# Altium PCB ARAStronaut.PcbDoc
Units mm, origin at the board's own origin, x right, y up, seen from the top; angles counter-clockwise.
Board outline 152.4 x 101.6 mm, 2 copper layers (Top Layer, Bottom Layer); 65 components, 48 nets, 267 pads, 0 vias.
Unrouted connection lines stored in the file: 180.
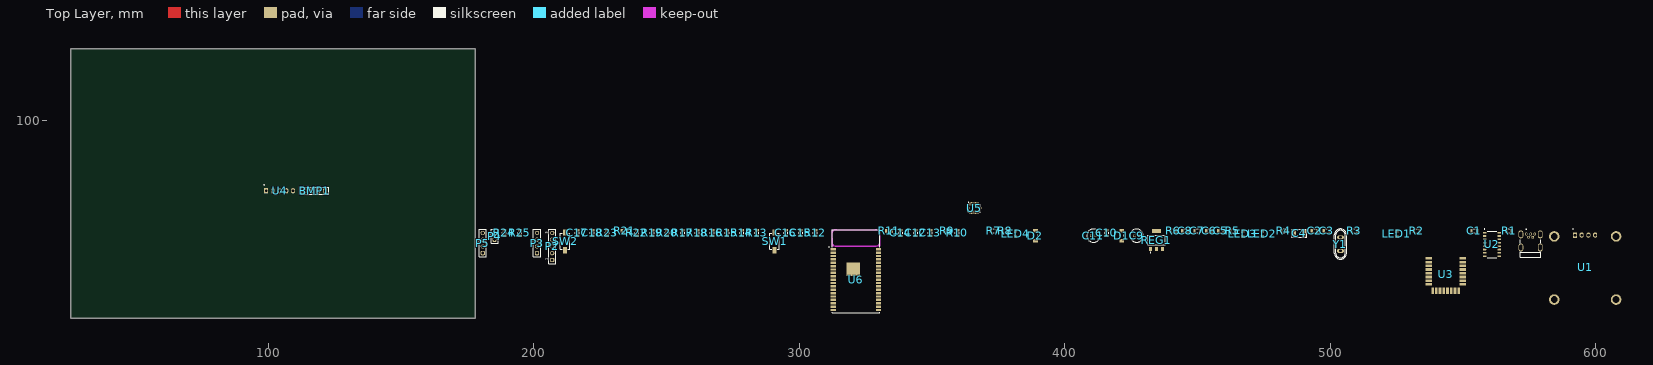
[diagram p0: Top Layer view]
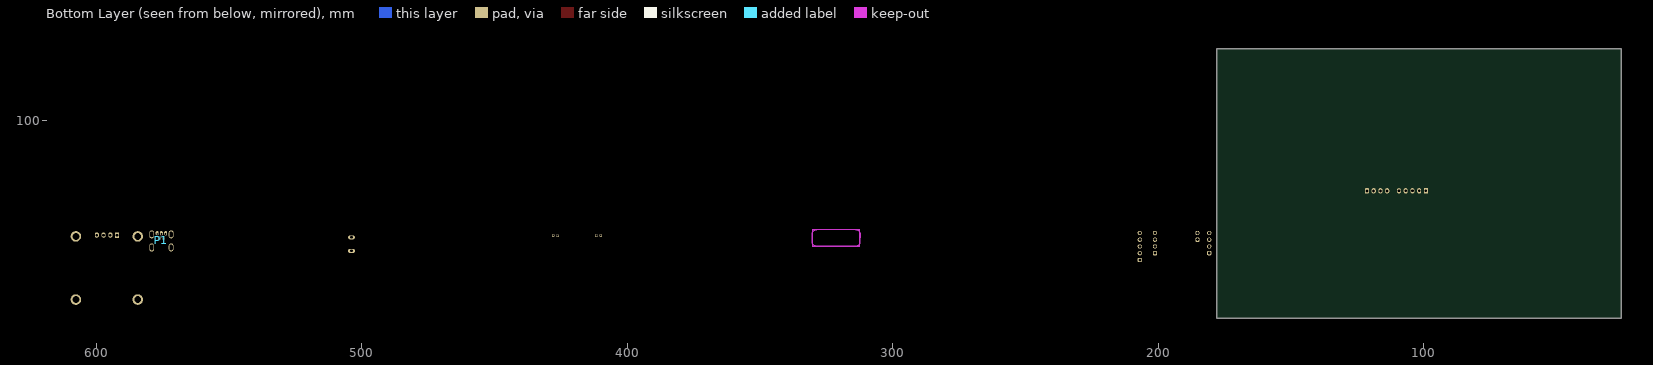
[diagram p1: Bottom Layer view, seen from below]

## Layer stack, top to bottom
Top Solder: solder mask 0.0102, Solder Resist, Dk 3.5
Top Layer: signal copper 0.0356
Dielectric 1: dielectric 0.32, FR-4, Dk 4.8
Bottom Layer: signal copper 0.0356
Bottom Solder: solder mask 0.0102, Solder Resist, Dk 3.5

## Board outline
25.4,25.4 177.8,25.4 177.8,127 25.4,127

## Design rules (kind name [scope] priority, off if disabled: settings)
Clearance [All] p1: gap=0.2 ignorepadtopadclearanceinfootprint=FALSE except(0.3: Arc-Poly Track-Poly SMDPad-Poly THPad-Poly Via-Poly Fill-Poly Poly-Poly Poly-Region Poly-Text Poly-Hole)
PolygonConnect [All] p1: connectstyle=Relief reliefconductorwidth=0.254 reliefentries=4 polygonreliefangle="90 Angle" airgapwidth=0.254
RoutingVias [All] p1: holewidth=0.5 width=0.8 viastyle="Through Hole" minholewidth=0.5 minwidth=0.8 maxholewidth=1.5 maxwidth=2
SolderMaskExpansion [All] p1: expansion=0.102 istentingtop=FALSE
Width [All] p1: maxlimit=0.6 minlimit=0.3 preferedwidth=0.3
30 further rules are at their usual default settings.

## Components (designator, comment, footprint, x,y, rotation, side; value= is the part's Value field where it differs from the comment)
BMP1 "BMP_180_MOD" BMP180 117.475,73.406 r180 top
C1 "22pf" "SMD 805 CAP" 554.355,58.293 r0 top
C2 "1uF" "SMD 805 CAP" 494.157,58.293 r0 top
C3 "10uF" "SMD 805 CAP" 498.729,58.293 r0 top
C4 "10uF" MY_CAP_SMD-B 488.442,57.404 r0 top value=3300u
C5 "10uf" "SMD 805 CAP" 458.851,58.293 r0 top
C6 "1uF" "SMD 805 CAP" 454.406,58.293 r0 top
C7 "100nf" "SMD 805 CAP" 449.961,58.293 r0 top
C8 "22pf" "SMD 805 CAP" 445.389,58.293 r0 top
C9 "47uF-5mm" "MY_CAP_POL 5MM" 427.101,56.515 r0 top value=3300u
C10 "1uF" "SMD 805 CAP" 415.798,57.531 r90 top
C11 "33uF-5mm" "MY_CAP_POL 5MM" 410.845,56.515 r0 top value=3300u
C12 "100nF" "SMD 805 CAP" 343.789,57.531 r90 top
C13 "100nF" "SMD 805 CAP" 349.377,57.531 r90 top
C14 "1uF" "SMD 805 CAP" 338.201,57.531 r90 top
C15 "100nF" "SMD 805 CAP" 300.482,57.531 r90 top
C16 "100nF" "SMD 805 CAP" 294.894,57.531 r90 top
C17 "22uF" "SMD 805 CAP" 216.408,57.531 r90 top
C18 "100nF" "SMD 805 CAP" 221.996,57.531 r90 top
D1 "MM 5.1V" MiniMelf 421.513,56.515 r90 top
D2 "MM 3.6V" MiniMelf 389.001,56.515 r90 top
LED1 "LED_SMD_0805" LED_0805 525.145,57.277 r90 top
LED2 "LED_SMD_0805" LED_0805 474.472,57.277 r90 top
LED3 "LED_SMD_0805" LED_0805 467.106,57.277 r90 top
LED4 "LED_SMD_0805" LED_0805 381.508,57.277 r90 top
P1 "USB_Mini_Dip_Right" USB_MINI_Right 575.564,54.737 r0 top
P2 "61300511121" 61300511121 206.883,52.451 r90 top
P3 "61300411121" 61300411121 201.168,53.721 r90 top
P4 "61300211121" 61300211121 185.166,56.261 r90 top
P5 "61300411121" 61300411121 180.721,53.721 r90 top
R1 "1k" "SMD 805" 567.436,58.293 r0 top
R2 "1k" "SMD 805" 532.638,58.293 r0 top
R3 "10K" "SMD 805" 509.143,58.293 r0 top
R4 "10K" "SMD 805" 482.6,58.293 r0 top
R5 "1k" "SMD 805" 463.423,58.293 r0 top
R6 "680" "SMD 805" 440.944,58.293 r0 top
R7 "1k" "SMD 805" 373.253,58.293 r0 top
R8 "INF" "SMD 805" 377.698,58.293 r0 top
R9 "INF" "SMD 805" 355.727,58.293 r0 top
R10 "4.7K" "SMD 805" 359.537,57.531 r90 top
R11 "1k" "SMD 805" 333.883,58.293 r0 top
R12 "0" "SMD 805" 306.07,57.531 r90 top
R13 "4.7k" "SMD 805" 283.972,57.531 r90 top
R14 "INF" "SMD 805" 278.384,57.531 r90 top
R15 "INF" "SMD 805" 272.796,57.531 r90 top
R16 "INF" "SMD 805" 267.208,57.531 r90 top
R17 "0" "SMD 805" 256.032,57.531 r90 top
R18 "220" "SMD 805" 261.62,57.531 r90 top
R19 "0" "SMD 805" 244.602,57.531 r90 top
R20 "220" "SMD 805" 250.19,57.531 r90 top
R21 "0" "SMD 805" 234.188,58.293 r0 top
R22 "220" "SMD 805" 238.76,57.531 r90 top
R23 "1k" "SMD 805" 227.584,57.531 r90 top
R24 "4.7k" "SMD 805" 188.849,57.531 r90 top
R25 "4.7k" "SMD 805" 194.691,57.531 r90 top
REG1 "LD1117 3.3" MY_LD1117-3.3 434.594,54.991 r0 top
SW1 "BOOT" WS-TASV_L6W3.5H4.3_4341x10438x6 290.703,54.356 r90 top
SW2 "ENABLE" WS-TASV_L6W3.5H4.3_4341x10438x6 211.709,54.356 r90 top
U1 "SSD1306" SSD1306 596.138,44.577 r0 top
U2 "CH340G" CH340G 560.959,53.213 r0 top
U3 "DWM1000" DWM1000 543.306,45.212 r0 top
U4 "HMC5883L" HMC5883L-GY271 102.91,73.476 r0 top
U5 "BMI088" BMI088 365.887,66.929 r0 top
U6 "ESP32-WROVER-I" ESP32-WROVER-I 320.167,40.386 r0 top
Y1 "CRYSTAL" My_Crystal 503.936,53.34 r90 top

## Footprints (in the part's own frame and the unit in brackets; to place one, negate y for a bottom-side part, rotate by r counter-clockwise, add the part's x,y. Pads: shape width x height; smd on the part's side, far side on the other; paste and mask are expansions set on the pad)
61300211121 [mm] "Pin Header, pitch 2.54 mm, THT, Vertical, single row, 2p"
  rrect50% 1.6x1.6 hole 1.1: 1(-1.27,0)
  round 1.6 hole 1.1: 2(1.27,0)
  silkscreen extent -2.69,-1.35 2.69,1.35, body extent -2.54,-1.27 2.54,1.27, height 8.57
61300411121 [mm] "Pin Header, pitch 2.54 mm, THT, Vertical, single row, 4p"
  rrect50% 1.6x1.6 hole 1.1: 1(-3.81,0)
  round 1.6 hole 1.1: 2(-1.27,0) 3(1.27,0) 4(3.81,0)
  silkscreen extent -5.23,-1.35 5.23,1.35, body extent -5.08,-1.27 5.08,1.27, height 8.57
61300511121 [mm] "Pin Header, pitch 2.54 mm, THT, Vertical, single row, 5p"
  rrect50% 1.6x1.6 hole 1.1: 1(-5.08,0)
  round 1.6 hole 1.1: 2(-2.54,0) 3(0,0) 4(2.54,0) 5(5.08,0)
  silkscreen extent -6.5,-1.35 6.5,1.35, body extent -6.35,-1.27 6.35,1.27, height 8.57
BMI088 [mm]
  oval 1x0.254 smd: 1(-2.471,-0.005) 1(2.471,-0.005)
  oval 0.254x1 smd: 1(-1.505,-1.721) 1(-1.505,1.721) 1(-1.005,-1.721) 1(-1.005,1.721) 1(-0.505,-1.721) 1(-0.505,1.721) 1(-0.005,-1.721) 1(-0.005,1.721) 1(0.495,-1.721) 1(0.495,1.721) 1(0.995,-1.721) 1(0.995,1.721) 1(1.495,1.721) 1(1.505,-1.721)
  rect 0.35x0.59 smd: 1(-1.505,1.161) 2(-1.005,1.161) 3(-0.505,1.161) 4(-0.005,1.161) 5(0.495,1.161) 6(0.995,1.161) 7(1.495,1.161) 9(1.495,-1.169) 10(0.995,-1.169) 11(0.495,-1.169) 12(-0.005,-1.169) 13(-0.505,-1.169) 14(-1.005,-1.169) 15(-1.505,-1.169)
  rect 0.59x0.35 smd: 8(1.91,-0.004) 16(-1.92,-0.004)
  silkscreen extent -2.26,-1.5 2.24,2.19, body extent -2.26,-1.5 2.24,1.5, height 1
BMP180 [mm]
  rrect50% 1.6x2 hole 1.1: 1(-3.81,0)
  oval 1.6x2 hole 1.1: 2(-1.27,0) 3(1.27,0) 4(3.81,0)
  silkscreen extent -5.23,-1.35 5.23,1.35, body extent -5.11,-1.19 5.11,11.8, height 5.69
CH340G [mm]
  rrect25% 1.31x0.62 smd: 1(-2.75,4.445) 2(-2.75,3.175) 3(-2.75,1.905) 4(-2.75,0.635) 5(-2.75,-0.635) 6(-2.75,-1.905) 7(-2.75,-3.175) 8(-2.75,-4.445) 9(2.75,-4.445) 10(2.75,-3.175) 11(2.75,-1.905) 12(2.75,-0.635) 13(2.75,0.635) 14(2.75,1.905) 15(2.75,3.175) 16(2.75,4.445)
  silkscreen extent -2.85,-5 1.78,5.85, body extent -3,-5 3,5, height 1.8
DWM1000 [mm]
  rect 2.45x1 smd: 1(-6.146,2.726) 2(-6.146,1.326) 3(-6.146,-0.074) 4(-6.146,-1.474) 5(-6.146,-2.874) 6(-6.146,-4.274) 7(-6.146,-5.674) 8(-6.146,-7.074) 17(6.654,-7.074) 18(6.654,-5.674) 19(6.654,-4.274) 20(6.654,-2.874) 21(6.654,-1.474) 22(6.654,-0.074) 23(6.654,1.326) 24(6.654,2.726)
  rect 1x2.45 smd: 9(-4.646,-9.369) 10(-3.246,-9.369) 11(-1.846,-9.369) 12(-0.446,-9.369) 13(0.954,-9.369) 14(2.354,-9.369) 15(3.754,-9.369) 16(5.154,-9.369)
  body extent -6.36,-9.59 6.84,13.41, height 3.15
ESP32-WROVER-I [mm]
  rect 2x0.9 smd: 1(-7.327,10.982) 2(-7.327,9.712) 3(-7.327,8.442) 4(-7.327,7.172) 5(-7.327,5.902) 6(-7.327,4.632) 7(-7.327,3.362) 8(-7.327,2.092) 9(-7.327,0.822) 10(-7.327,-0.448) 11(-7.327,-1.718) 12(-7.327,-2.988) 13(-7.327,-4.258) 14(-7.327,-5.528) 15(-7.327,-6.798) 16(-7.327,-8.068) 17(-7.327,-9.338) 18(-7.327,-10.608) 19(-7.327,-11.878) 20(9.673,-11.878) 21(9.673,-10.608) 22(9.673,-9.338) 23(9.673,-8.068) 24(9.673,-6.798) 25(9.673,-5.528) 26(9.673,-4.258) 27(9.673,-2.988) 28(9.673,-1.718) 29(9.673,-0.448) 30(9.673,0.822) 31(9.673,2.092) 32(9.673,3.362) 33(9.673,4.632) 34(9.673,5.902) 35(9.673,7.172) 36(9.673,8.442) 37(9.673,9.712) 38(9.673,10.982)
  rect 5x5 smd paste-1.835 mask-1.835: 39(0.173,3.482)
  Keep-Out Layer board cut-out: -7.75,12.142 -7.75,18.365 10.11,18.365 10.11,12.142
  Keep-Out Layer lines w0.254: -7.863,16.841 cw(c-6.301,16.841) -6.301,18.403 8.373,18.403 cw(c8.373,16.584) 10.193,16.584 10.125,13.588 cw(c8.768,13.588) 8.768,12.23 3.432,12.18 -0.292,12.18 -6.445,12.18 cw(c-6.445,13.489) -7.754,13.489 -7.863,16.841
  silkscreen extent -9.15,-12.98 10.17,18.42, body extent -7.83,-12.98 10.17,18.42, height 3.4
HMC5883L-GY271 [mm]
  rect 1.508x2 hole 1: 1(-3.85,-0.07)
  oval 1.508x2 hole 1: 2(-1.31,-0.07) 3(1.23,-0.07) 4(3.77,-0.07) 5(6.31,-0.07)
  silkscreen extent -4.65,2.08 -4.45,2.28, body extent -5.97,-12.12 8.53,1.38, height 5.67
LED_0805 [mm]
  rect 1.1x1.2 smd: 1(-1.05,0) 2(1.05,0)
  silkscreen extent -2,-0.6 -1.8,0.6, body extent -1,-0.63 1,0.62, height 0.7
MiniMelf [mm]
  rect 1.3x1.8 smd: 1(-1.905,0) 2(1.905,0)
  silkscreen extent -0.3,-0.8 0.3,0.8, body extent -1.82,-0.8 1.88,0.8, height 1.6
"MY_CAP_POL 5MM" [mm]
  round 1 hole 0.7: +(-0.827,0) -(0.827,0)
  silkscreen extent -2.48,-2.49 2.49,2.49, body extent -2.74,-2.6 2.84,2.48, height 11.7
MY_CAP_SMD-B [mm] "3.1X4"
  rect 1.2x2.5 smd: +(-1.845,0) -(1.845,0)
  silkscreen extent -2.8,-1.55 2.8,1.55, body extent -1.85,-1.41 1.85,1.41, height 2.14
My_Crystal [mil]
  oct 60x100 hole 40: 1(-100,0)
  oval 60x100 hole 40: 2(100,0)
  silkscreen extent -225,-90 225,90, body extent -225,-90 222,93, height 150
MY_LD1117-3.3 [mm]
  rect 1.1x1.55 smd: 1(-2.3,-3.502) 2(0,-3.502) 3(2.3,-3.502)
  rect 3.45x1.55 smd: 4(0,3.248)
  silkscreen extent -3.35,-4.95 3.35,1.72, body extent -3.3,-3.85 3.2,3.05, height 1.6
"SMD 805" [mm]
  rect 0.9x1.5 smd: 1(1.05,0) 2(-1.05,0)
  silkscreen extent -0.3,-0.75 0.3,0.75, body extent -1,-0.62 1,0.63, height 0.78
"SMD 805 CAP" [mm]
  rect 0.9x1.5 smd: 1(1.05,0) 2(-1.05,0)
  silkscreen extent -0.3,-0.75 0.3,0.75, body extent -1,-0.62 1,0.63, height 0.78
SSD1306 [mm]
  rect 1.508x2 hole 1: 1(-3.85,12.146)
  oval 1.508x2 hole 1: 2(-1.31,12.146) 3(1.23,12.146) 4(3.77,12.146)
  round 4 hole 2.6: ""(-11.65,11.654) ""(-11.65,-12.146) ""(11.65,-12.146) ""(11.65,11.654)
  silkscreen extent -4.65,14.3 -4.45,14.5, body extent -14.22,-13.72 14.18,13.68, height 5.79
USB_MINI_Right [mm]
  oval 1.1x1.65 smd far side paste-2 mask+0: 1(-1.6,2.663) 2(-0.8,0.913) 3(0,2.663) 4(0.8,0.913) 5(1.6,2.663)
  round 1.05 hole 0.7: 6(-1.6,2.388) 7(-0.8,1.188) 8(0,2.388) 9(0.8,1.188) 10(1.6,2.388)
  oval 1.8x3 hole 1.2 slot 2 at 90 deg mask+0: 11(-3.65,-2.662) 12(-3.65,2.261) 12(3.65,-2.662) 12(3.65,2.261)
  oval 1.7x2.7 smd far side paste-2 mask+0: S1(-3.65,-2.662) S2(3.65,-2.662)
  silkscreen extent -3.85,-6.41 3.85,4.34, body extent -3.95,-6.43 3.95,2.97, height 3.9
WS-TASV_L6W3.5H4.3_4341x10438x6 [mm] "SMD Tact Switch, body 6x3.5mm"
  rect 2.3x1.5 smd: 1(-3.35,0) 2(3.35,0)
  silkscreen extent -3,-1.75 3,1.75, body extent -4,-1.75 4,1.75, height 4.3

## Part data
C1 C5 C7 C8: library part "CAP B", "1uf"
C2 C3 C6 C10 C12 C13 C14 C15 C16 C17 C18: library part "CAP B"
C4: library part CAP_TANTAL_B, "3.5X2.8MM"
C9 C11: library part "Cap Pol_5mm", "CAP-3300Uf"
D1 D2: library part MiniMelf_500mW, "MiniMelf_500mW", Package=None, Availability=Unavailable, MP=ZM4736A_L0, Price=None
P2: "WR-PHD Pin Header, THT, Vertical, pitch 2.54mm, 1 Row, 5P", Contact Resistance=20mΩ, Manufacturer="Wurth Elektronik", Operating Temperature Max=105°C, Operating Temperature Min=-40°C, Rated Current=3A, Withstanding Voltage=500V, Working Voltage=250V, Category="Board-to-Board Connectors", ComponentLink1Description="Website Link", ComponentLink1URL=https://www.we-online.com/redexpert/article/61300511121?ad, ComponentLink2Description="Datasheet Link", ComponentLink2URL=https://www.we-online.com/redexpert/spec/61300511121?ad, Gender="Pin Header", Manufacturer Part Number=61300511121, Match Code=WR-PHD, Mount="Through Hole", Number of Pins=5, Number of Rows=1, Orientation=Vertical, Packaging=Bag, Pitch=2.54mm
P3 P5: "WR-PHD Pin Header, THT, Vertical, pitch 2.54mm, 1 Row, 4P", Contact Resistance=20mΩ, Manufacturer="Wurth Elektronik", Operating Temperature Max=105°C, Operating Temperature Min=-40°C, Rated Current=3A, Withstanding Voltage=500V, Working Voltage=250V, Category="Board-to-Board Connectors", ComponentLink1Description="Website Link", ComponentLink1URL=https://www.we-online.com/redexpert/article/61300411121?ad, ComponentLink2Description="Datasheet Link", ComponentLink2URL=https://www.we-online.com/redexpert/spec/61300411121?ad, Gender="Pin Header", Manufacturer Part Number=61300411121, Match Code=WR-PHD, Mount="Through Hole", Number of Pins=4, Number of Rows=1, Orientation=Vertical, Packaging=Bag, Pitch=2.54mm
P4: "WR-PHD Pin Header, THT, Vertical, pitch 2.54mm, 1 Row, 2P", Contact Resistance=20mΩ, Manufacturer="Wurth Elektronik", Operating Temperature Max=105°C, Operating Temperature Min=-40°C, Rated Current=3A, Withstanding Voltage=500V, Working Voltage=250V, Category="Board-to-Board Connectors", ComponentLink1Description="Website Link", ComponentLink1URL=https://www.we-online.com/redexpert/article/61300211121?ad, ComponentLink2Description="Datasheet Link", ComponentLink2URL=https://www.we-online.com/redexpert/spec/61300211121?ad, Gender="Pin Header", Manufacturer Part Number=61300211121, Match Code=WR-PHD, Mount="Through Hole", Number of Pins=2, Number of Rows=1, Orientation=Vertical, Packaging=Bag, Pitch=2.54mm
R1 R2 R3 R4 R5 R6 R7 R8 R9 R10 R11 R12 R13 R14 R15 R16 R17 R18 R19 R20 R21 R22 R23 R24 R25: library part Resistor
SW1 SW2: library part 434111043826, "WS-TASV SMT Tact Switch, L6 x W3.5 x H4.3mm, 260g, SPST-NO, 12V, 50mA", Manufacturer="Wurth Elektronik", Operating Temperature Max=85°C, Operating Temperature Min=-40°C, Rated Current=50mA, Rated Voltage (DC)=12V, Category="Tact Switches", Circuit=SPST-NO, ComponentLink1Description="Website Link", ComponentLink1URL=https://www.we-online.com/redexpert/article/434111043826?ad, ComponentLink2Description="Datasheet Link", ComponentLink2URL=https://www.we-online.com/redexpert/spec/434111043826?ad, Contact Material="Stainless Steel", Contact Plating=Silver, Height=4.3mm, Length=6mm, Manufacturer Part Number=434111043826, Match Code=WS-TASV, Mount="Surface Mount", Operation Force=260g, Packaging="Tape and Reel", Terminal Material="Copper Alloy", Terminal Plating=Silver, Washable=No, Width=3.5mm
Y1: "Crystal"

## Nets (pads, with @x,y where several pads share a name; then routed paths per layer and width w, separated by ;. In a path a pad name is that pad's centre, name@x,y a point inside that pad or via, vN(x,y) a via of type N, cw(c..) or ccw(c..) an arc to the next point about the centre after c; other vN are vias at no path point)
+3V3: BMP1.1 C2.1 C3.1 C4.+ C6.2 C11.+ C12.2 C13.2 C14.1 D2.2 P5.4 R3.1 R4.1 R6.2 R8.2 R9.2 R10.2 R11.1 R12.2 R23.2 R24.1 R25.1 REG1.2 REG1.4 U1.2 U3.5 U3.6 U3.7 U4.5 U5.3 U5.11
+3V3_USB: LED1.2 LED3.2
ACCEL_INT: U5.1 U6.11
BOOT: C16.2 R11.2 SW1.2 U6.25
BUS_SCL: BMP1.3 P4.1 R3.2 R24.2 U1.3 U4.3 U6.36
BUS_SDA: BMP1.4 P4.2 R4.2 R25.2 U1.4 U4.2 U6.33
CS_ACC: P2.1 R10.1 U5.14 U6.8
CS_GYR: P2.2 R9.1 U5.5 U6.10
CS_UWB: U3.17 U6.29
D+: P1.3 P1.8 U2.5
D-: P1.2 P1.7 U2.6
ENABLE: C17.2 C18.2 R23.1 SW2.2 U6.3
GND: BMP1.2 C1.2 C2.2 C3.2 C4.- C5.2 C6.1 C7.1 C8.1 C9.- C10.1 C11.- C12.1 C13.1 C14.2 C15.1 C16.1 C18.1 D1.1 D2.1 LED2.1 LED4.1 P1.5 P1.10 P1.11 P1.12 P1.S1 P1.S2 P5.3 R7.1 R13.2 REG1.1 SW1.1 U1.1 U2.1 U3.8 U3.16 U3.21 U3.23 U3.24 U4.4 U5.2 U5.4 U5.6 U6.1 U6.15 U6.38 U6.39
GPIO4: P3.1 U6.26
GPIO15: P3.2 U6.23
GYRO_INT: U5.13 U6.9
HMC_INT: U4.1 U6.7
IRQ: U3.22 U6.6
MISO_IMU: P2.5 R14.1 R19.1 U5.10 U5.15
MISO_UWB: R19.2 R20.1 U3.19
MOSI_IMU: P2.4 R15.1 R21.1 U5.9
MOSI_UWB: R21.2 R22.1 U3.18
NetC1_1: C1.1 U2.8 Y1.2
NetC7_2: C7.2 U2.4
NetC8_2: C8.2 U2.7 Y1.1
NetC15_2: C15.2 R12.1 U6.2
NetC17_1: C17.1 SW2.1
NetLED1_1: LED1.1 R1.2
NetLED2_2: LED2.2 R2.1
NetLED3_1: LED3.1 R5.2
NetLED4_2: LED4.2 R6.1
NetR7_2: R7.2 R8.1 U5.7
NetR13_1: R13.1 U6.24
NetR14_2: R14.2 U6.14
NetR15_2: R15.2 U6.16
NetR16_2: R16.2 U6.13
NetR18_2: R18.2 U6.30
NetR20_2: R20.2 U6.31
NetR22_2: R22.2 U6.37
NetU5_12: U5.12 U5.16
RESET: U3.3 U6.12
RX_ESP: P5.2 R1.1 U2.2 U6.34
SCK_IMU: P2.3 R16.1 R17.1 U5.8
SCK_UWB: R17.2 R18.1 U3.20
Sensor_VN: P3.3 U6.5
Sensor_VP: P3.4 U6.4
TX_ESP: P5.1 R5.1 U2.3 U6.35
VBUS: C5.1 C9.+ C10.2 D1.2 P1.1 P1.6 R2.2 REG1.3 U2.16
pads on no net: P1.4 P1.9 U1. U2.9 U2.10 U2.11 U2.12 U2.13 U2.14 U2.15 U3.1 U3.2 U3.4 U3.9 U3.10 U3.11 U3.12 U3.13 U3.14 U3.15 U6.17 U6.18 U6.19 U6.20 U6.21 U6.22 U6.27 U6.28 U6.32

## Text inside footprints (layer, text, board x,y; h text height)
C9: Top Overlay "-" at 427.608,56.809 h1.52
C11: Top Overlay "-" at 411.352,56.809 h1.52
P2: Top Overlay "1" at 205.183,47.251 h1.02 r90; Top Overlay "5" at 205.183,57.151 h1.02 r90